# Altium PCB PCB1.PcbDoc
Units mm, origin at the board's own origin, x right, y up, seen from the top; angles counter-clockwise.
Board outline 75.17 x 80.24 mm, 2 copper layers (Top Layer, Bottom Layer); 69 components, 48 nets, 224 pads, 0 vias.
Unrouted connection lines stored in the file: 12.
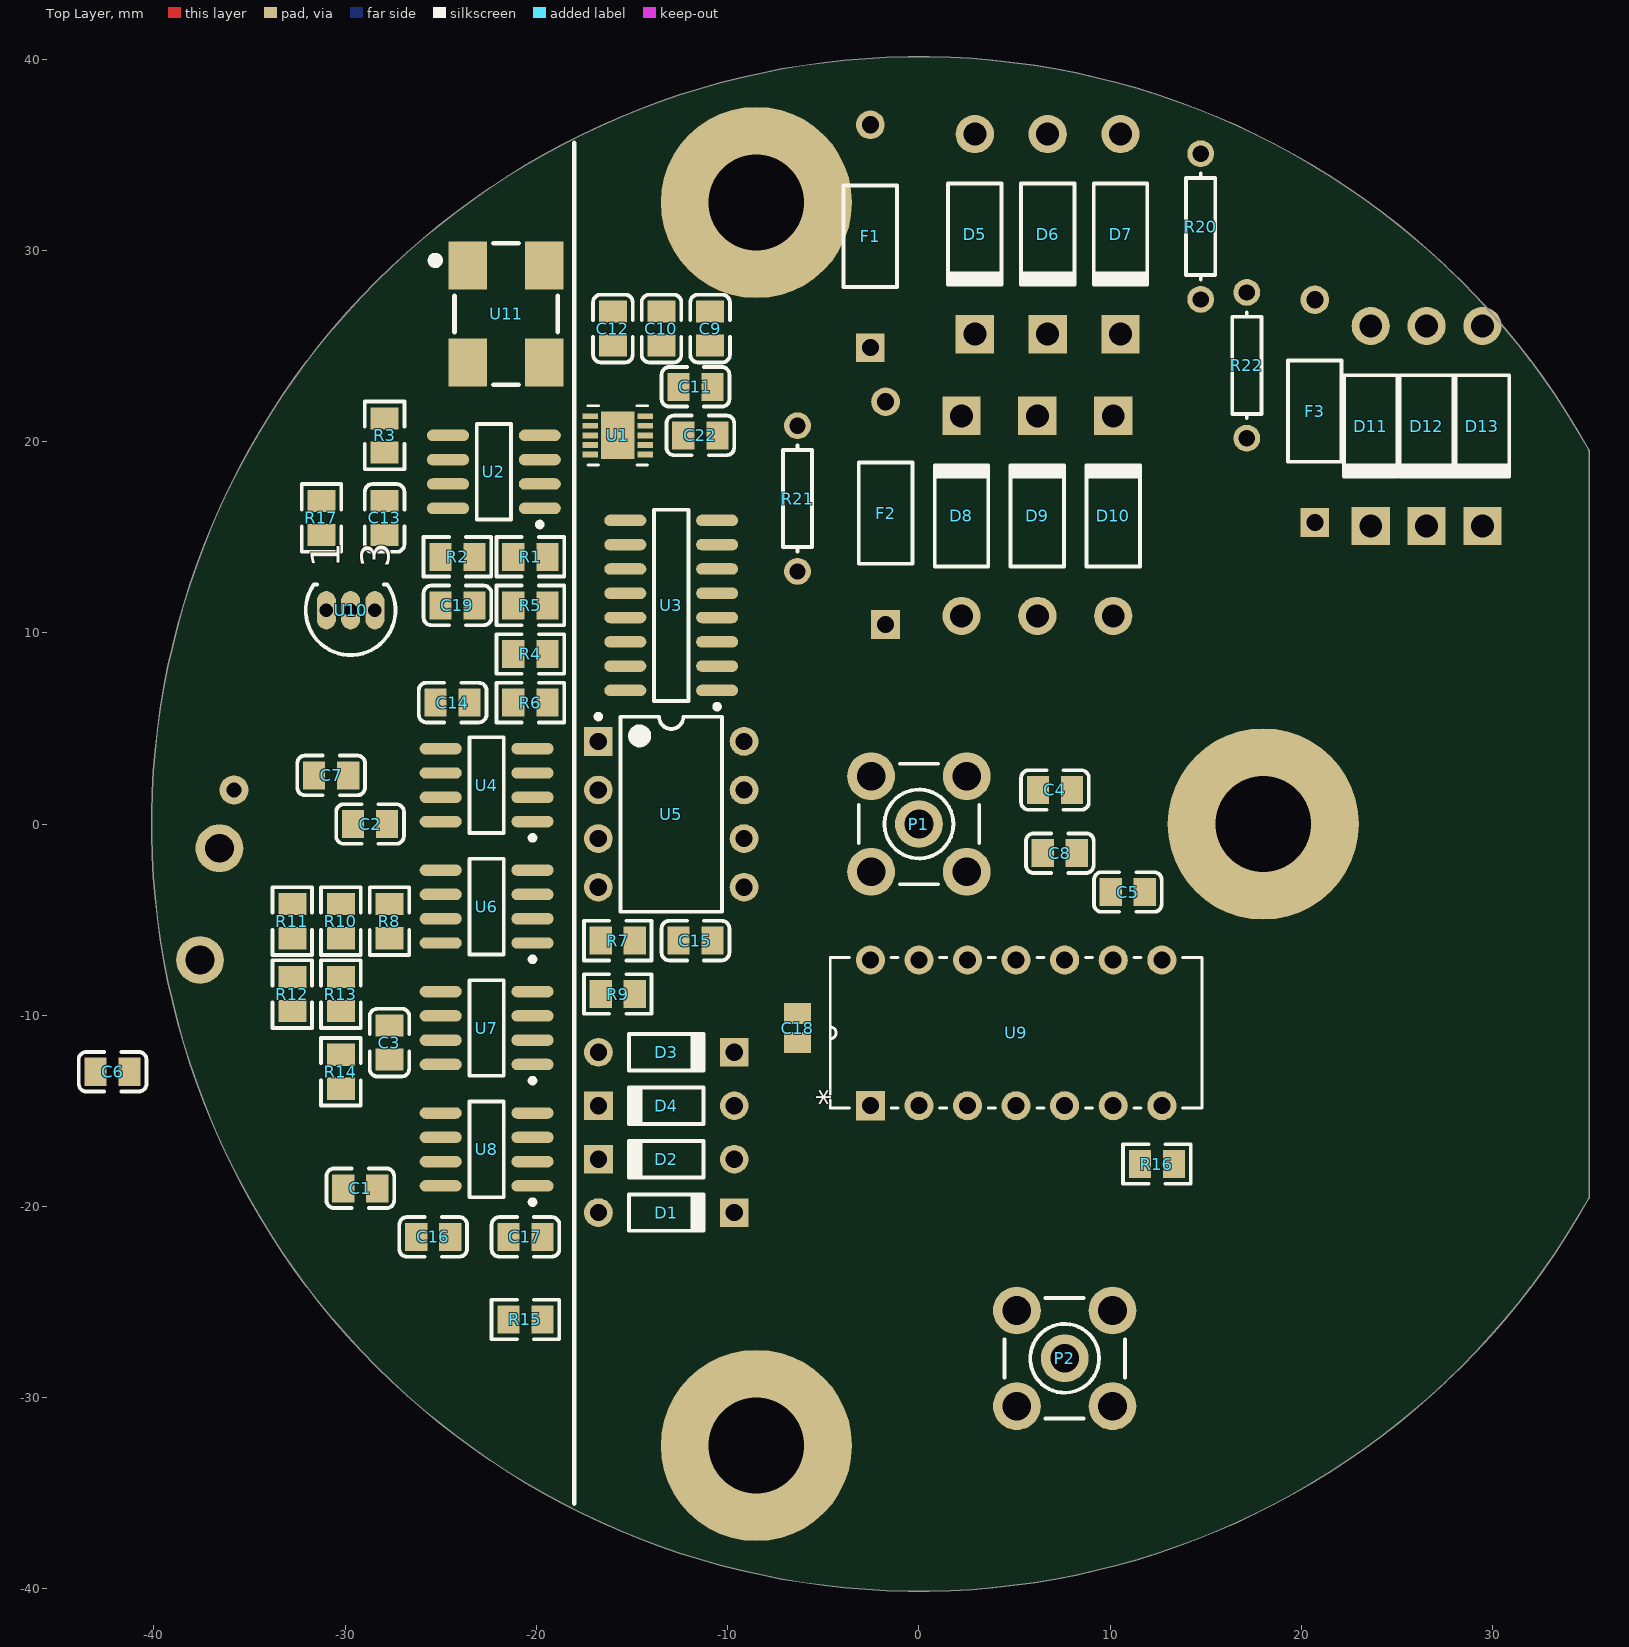
[diagram p0: Top Layer view]
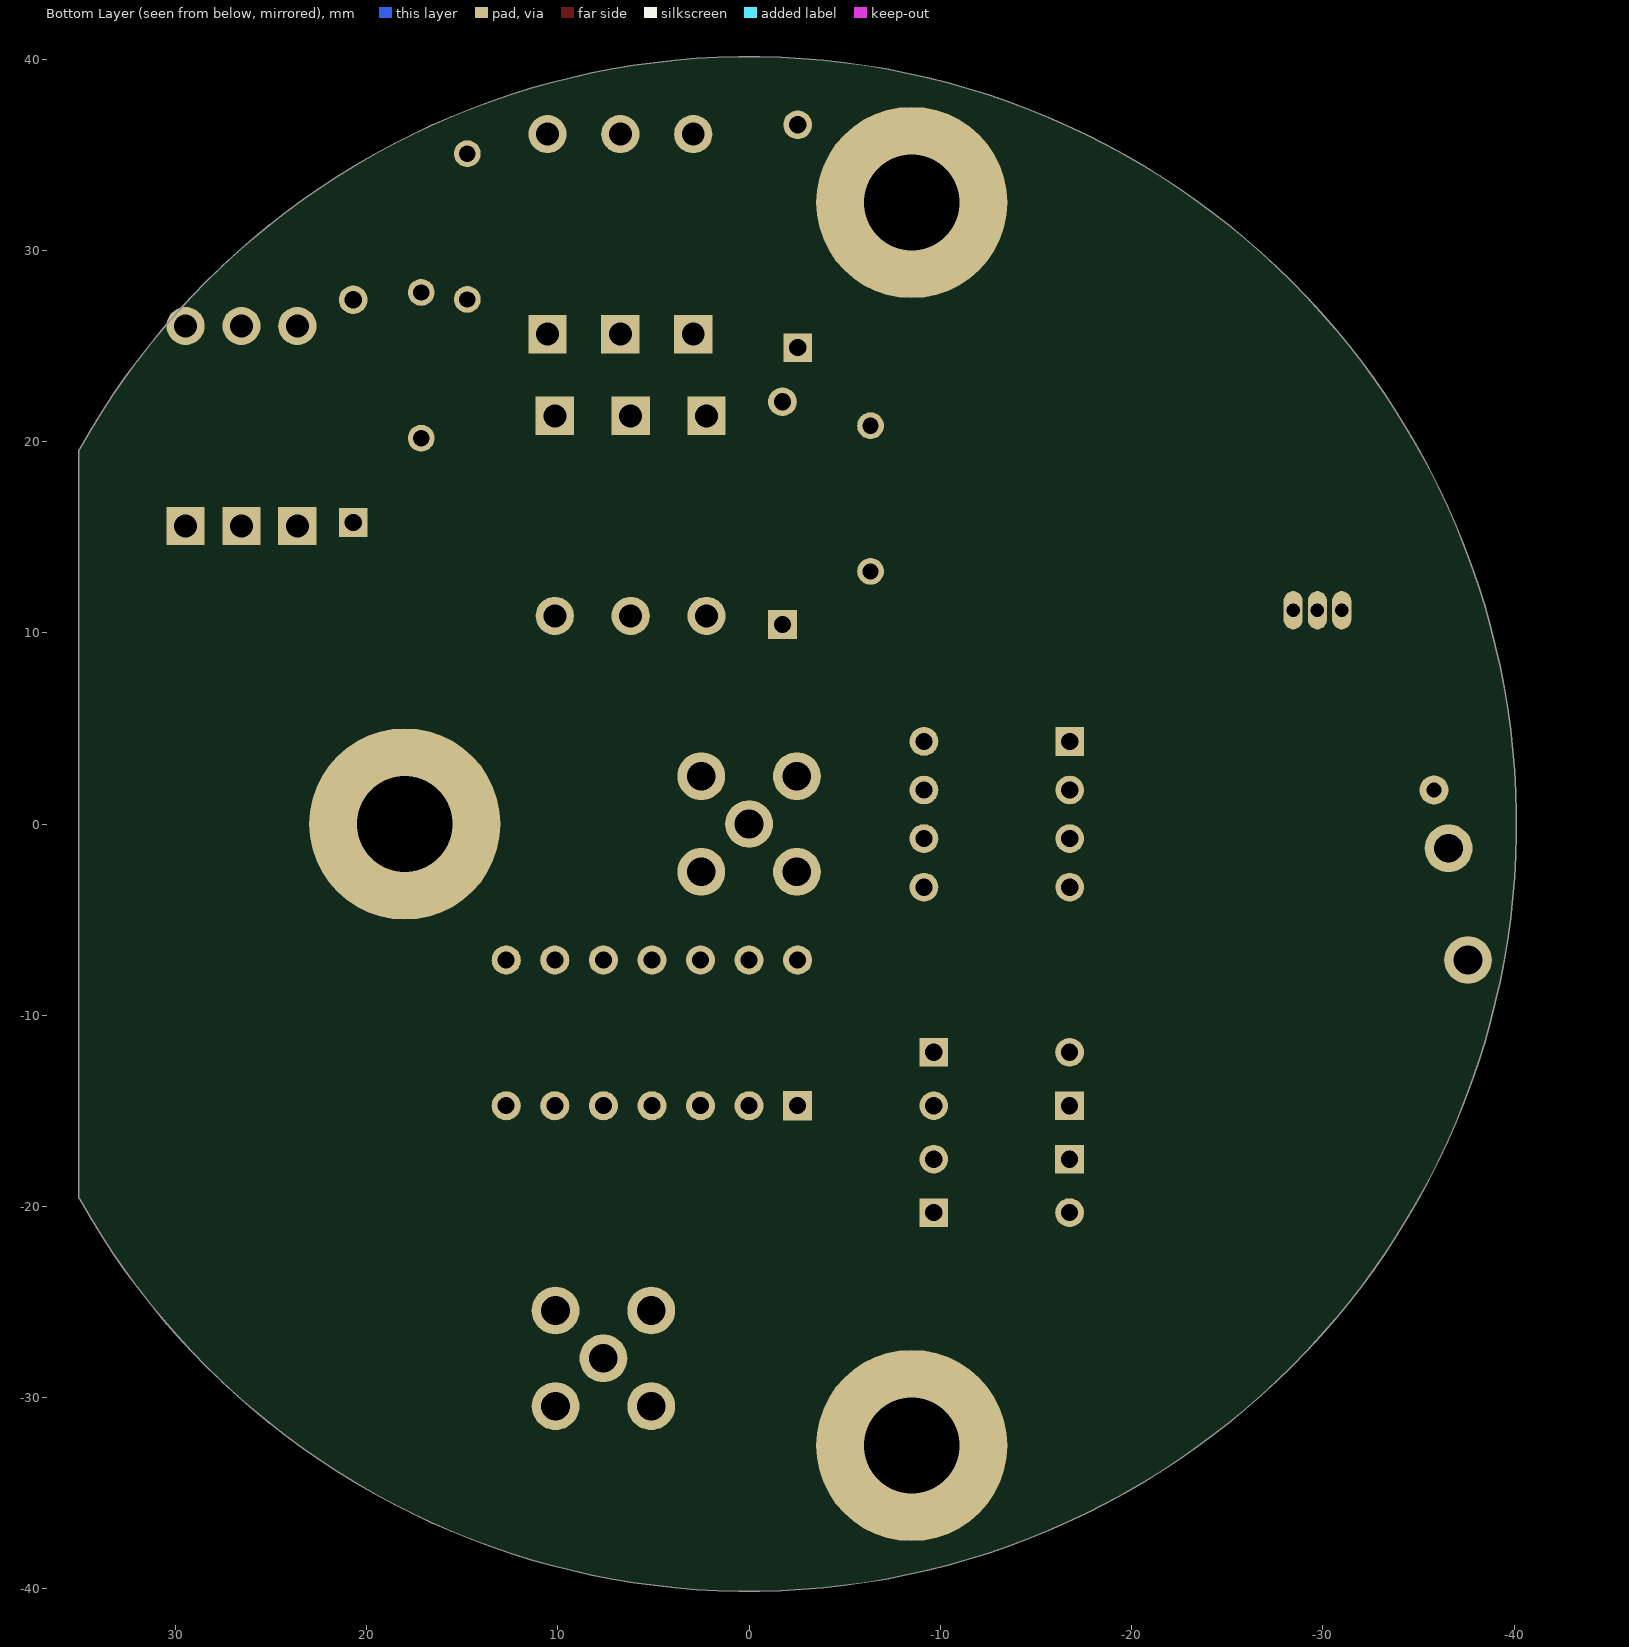
[diagram p1: Bottom Layer view, seen from below]

## Layer stack, top to bottom
Top Solder: solder mask 0.0102, Solder Resist, Dk 3.5
Top Layer: signal copper 0.0356
Dielectric1: dielectric 0.32, FR-4, Dk 4.8
Bottom Layer: signal copper 0.0356
Bottom Solder: solder mask 0.0102, Solder Resist, Dk 3.5

## Board outline
35.008,-19.604 cw(c0,0) 35.008,19.604 cw(c34.897,19.542) 35.023,19.564 cw(c34.925,19.482) 35.052,19.482 35.052,-19.507 cw(c34.925,-19.507) 35.009,-19.603 cw(c34.897,-19.542)

## Design rules (kind name [scope] priority, off if disabled: settings)
Clearance [All] p1: gap=0.254
PolygonConnect [All] p1: connectstyle=Relief reliefconductorwidth=0.254 reliefentries=4 polygonreliefangle="90 Angle" airgapwidth=0.254
RoutingVias [All] p1: holewidth=0.711 width=1.27 viastyle="Through Hole" minholewidth=0.711 minwidth=1.27 maxholewidth=0.711 maxwidth=1.27
SolderMaskExpansion [All] p1: expansion=0.102
Width PWR [InNetClass('PWR')] p1: maxlimit=1 minlimit=1 preferedwidth=1
Width [All] p2: maxlimit=0.3 minlimit=0.3 preferedwidth=0.3
29 further rules are at their usual default settings.

## Classes and differential pairs
component class 齐纳安全栅: D5 D6 D7 D8 D9 D10 D11 D12 D13 F1 F2 F3 R20 R21 R22
component class "Rectification filter": C1 C2 C3 C4 C5 C6 C7 C8 C16 C17 C18 C19 D1 D2 D3 D4 P2 R8 R9 R10 R11 R12 R13 R14 R15 R16 R17 U7 U8 U9 U10
component class "Sin wave": C9 C10 C11 C12 C13 C14 C15 C22 P1 R1 R2 R3 R4 R5 R6 R7 U1 U2 U3 U4 U5 U6 U11

## Components (designator, comment, footprint, x,y, rotation, side; value= is the part's Value field where it differs from the comment)
C1 "100nF(104) 10% 50V" LC-0805_C -29.21,-19.05 r0 top
C2 "100nF(104) 10% 50V" LC-0805_C -28.702,0 r0 top
C3 "100nF(104) 10% 50V" LC-0805_C -27.686,-11.43 r270 top
C4 "100nF(104) 10% 50V" LC-0805_C 7.112,1.778 r180 top
C5 "100nF(104) 10% 50V" LC-0805_C 10.922,-3.556 r180 top
C6 "100nF(104) 10% 50V" LC-0805_C -42.164,-12.954 r180 top
C7 "100nF(104) 10% 50V" LC-0805_C -30.734,2.54 r180 top
C8 "100nF(104) 10% 50V" LC-0805_C 7.366,-1.524 r0 top
C9 "10uF (106) 10% 25V" LC-0805_C -10.922,25.908 r270 top
C10 "100nF(104) 10% 50V" LC-0805_C -13.462,25.908 r270 top
C11 "1nF (102) 10% 50V" LC-0805_C -11.684,22.86 r180 top
C12 "100nF(104) 10% 50V" LC-0805_C -16.002,25.908 r270 top
C13 "100nF(104) 10% 50V" LC-0805_C -27.94,16.002 r90 top
C14 "1uF (105) 10% 50V" LC-0805_C -24.384,6.35 r0 top
C15 "1uF (105) 10% 50V" LC-0805_C -11.684,-6.096 r0 top
C16 "220nF (224) 10% 50V" LC-0805_C -25.4,-21.59 r0 top
C17 "100nF(104) 10% 50V" LC-0805_C -20.574,-21.59 r180 top
C18 "Cap Pol3" C0805 -6.35,-10.668 r270 top
C19 "100nF(104) 10% 50V" LC-0805_C -24.13,11.43 r180 top
C22 "22pF (220) 5% 50V" LC-0805_C -11.43,20.32 r0 top
D1 "Diode 1N4148" DO-35 -13.208,-20.32 r0 top
D2 "Diode 1N4148" DO-35 -13.208,-17.526 r180 top
D3 "Diode 1N4148" DO-35 -13.208,-11.938 r0 top
D4 "Diode 1N4148" DO-35 -13.208,-14.732 r180 top
D5 "1N4743A" DO-41 2.921,30.844 r270 top
D6 "1N4743A" DO-41 6.731,30.844 r270 top
D7 "1N4743A" DO-41 10.541,30.844 r270 top
D8 "1N4743A" DO-41 2.224,16.112 r90 top
D9 "1N4743A" DO-41 6.192,16.112 r90 top
D10 "1N4743A" DO-41 10.16,16.112 r90 top
D11 "1N4729A" DO-41 23.623,20.811 r270 top
D12 "1N4729A" DO-41 26.544,20.811 r270 top
D13 "1N4729A" DO-41 29.464,20.811 r270 top
F1 "Fuse 1" PIN-W2/E2.8 -2.54,30.734 r90 top
F2 "Fuse 1" PIN-W2/E2.8 -1.744,16.256 r90 top
F3 "Fuse 1" PIN-W2/E2.8 20.703,21.59 r90 top
P1 "SMB" SMB_V-RJ45 0,0 r0 top
P2 "SMB" SMB_V-RJ45 7.62,-27.94 r0 top
R1 "4.7KΩ (4701) ±1%" LC-0805_R -20.32,13.97 r180 top
R2 "15KΩ (1502) ±1%" LC-0805_R -24.13,13.97 r180 top
R3 "68Ω (68R0) ±1%" LC-0805_R -27.94,20.32 r270 top
R4 "3.3KΩ (3301) ±1%" LC-0805_R -20.32,8.89 r180 top
R5 "6.8KΩ (6801) ±1%" LC-0805_R -20.32,11.43 r180 top
R6 "100KΩ (1003) ±1%" LC-0805_R -20.32,6.35 r0 top
R7 "100KΩ (1003) ±1%" LC-0805_R -15.748,-6.096 r180 top
R8 "0Ω (0R0) ±1%" LC-0805_R -27.686,-5.08 r270 top
R9 "0Ω (0R0) ±1%" LC-0805_R -15.748,-8.89 r180 top
R10 "10KΩ (1002) ±1%" LC-0805_R -30.226,-5.08 r90 top
R11 "10KΩ (1002) ±1%" LC-0805_R -32.766,-5.08 r270 top
R12 "10KΩ (1002) ±1%" LC-0805_R -32.766,-8.89 r90 top
R13 "20KΩ (2002) ±1%" LC-0805_R -30.226,-8.89 r270 top
R14 "20KΩ (2002) ±1%" LC-0805_R -30.226,-12.954 r270 top
R15 "0Ω (0R0) ±1%" LC-0805_R -20.574,-25.908 r0 top
R16 "0Ω (0R0) ±1%" LC-0805_R 12.446,-17.78 r0 top
R17 "10KΩ (1002) ±1%" LC-0805_R -31.242,16.002 r90 top
R20 "100Ω" AXIAL-0.3 14.732,31.242 r90 top
R21 "100Ω" AXIAL-0.3 -6.35,17.018 r90 top
R22 "10Ω" AXIAL-0.3 17.145,23.986 r270 top
U1 "AD9837BCPZ_RL" CP_10_9 -15.748,20.32 r0 top
U2 "AD8066AR" ADI-R-8_N -22.225,18.415 r180 top
U3 "DG413CY" NSO16_N -12.954,11.43 r180 top
U4 "AD8066AR" ADI-R-8_N -22.606,2.032 r180 top
U5 "AD844AN" ADI-N-8 -12.954,0.508 r0 top
U6 "AD8066AR" ADI-R-8_N -22.606,-4.318 r180 top
U7 "AD8066AR" ADI-R-8_N -22.606,-10.668 r180 top
U8 "AD8066AR" ADI-R-8_N -22.606,-17.018 r180 top
U9 "AD536AJD" D_14 12.7,-7.112 r90 top
U10 "LM336Z-5.0" TO-92 -29.718,11.176 r90 top
U11 "SG-310SCF 16MHZ 3.3V" LC-SMD-7050_4P -21.59,26.67 r270 top

## Footprints (in the part's own frame and the unit in brackets; to place one, negate y for a bottom-side part, rotate by r counter-clockwise, add the part's x,y. Pads: shape width x height; smd on the part's side, far side on the other; paste and mask are expansions set on the pad)
ADI-N-8 [mm] "DIP, 8-Leads, Body 9.59x6.6mm, Pitch 2.54mm"
  rect 1.5x1.5 hole 0.9: 1(-3.81,3.81)
  round 1.5 hole 0.9: 2(-3.81,1.27) 3(-3.81,-1.27) 4(-3.81,-3.81) 5(3.81,-3.81) 6(3.81,-1.27) 7(3.81,1.27) 8(3.81,3.81)
  silkscreen extent -3.93,-5.1 2.65,5.23, body extent -3.95,-5.07 3.95,5.07, height 5.33
ADI-R-8_N [mm] "SOIC, 8-Leads, Body 4.9x3.9mm, Pitch 1.27mm, IPC Medium Density"
  oval 2.2x0.6 smd: 1(-2.4,1.905) 2(-2.4,0.635) 3(-2.4,-0.635) 4(-2.4,-1.905) 5(2.4,-1.905) 6(2.4,-0.635) 7(2.4,0.635) 8(2.4,1.905)
  silkscreen extent -2.53,-2.5 0.9,2.88, body extent -2,-2.5 2,2.5, height 1.75
AXIAL-0.3 [mm] "Axial Device, Thru-Hole; 2 Leads; 0.3 in Pin Spacing"
  round 1.4 hole 0.85: 1(-3.81,0) 2(3.81,0)
  silkscreen extent -2.77,-0.76 2.77,0.76
C0805 [mm] "Chip Capacitor, Body 2.0x1.3mm, IPC High Density"
  rect 1.1x1.4 smd: 1(-0.75,0) 2(0.75,0)
  body extent -1.1,-0.72 1.1,0.72, height 1.4
CP_10_9 [mil]
  rect 32x12 smd mask+4: 1(-57,39.37) 2(-57,19.69) 3(-57,0) 4(-57,-19.69) 5(-57,-39.37) 6(57,-39.37) 7(57,-19.69) 8(57,0) 9(57,19.69) 10(57,39.37)
  rect 69x98 smd: 11(0,0)
  silkscreen extent -61,-61 61,61, body extent 0,0 10,10, height 10
D_14 [mil]
  rect 60x60 / inner round 60 / far side rect 60x60 hole 35: 1(-300,600)
  round 60 hole 35: 2(-300,500) 3(-300,400) 4(-300,300) 5(-300,200) 6(-300,100) 7(-300,0) 8(0,0) 9(0,100) 10(0,200) 11(0,300) 12(0,400) 13(0,500) 14(0,600)
  silkscreen extent -305,-83 5,682, body extent 0,0 10,10, height 10
DO-35 [mm] "Diode, Axial; Body 3.8 x 1.9 mm (LxDia. max), Lead Dia. 0.53 mm (max)"
  round 1.5 hole 0.9: 1(-3.55,0)
  rect 1.5x1.5 hole 0.9: 2(3.55,0)
  silkscreen extent -1.95,-0.95 2.05,0.95
DO-41 [mm] "Diode, Axial; Body 5.2 x 2.7 mm (LxDia. max), Lead Dia. 0.86 mm (max)"
  round 2 hole 1.2: 1(-5.23,0)
  rect 2x2 hole 1.2: 2(5.23,0)
  silkscreen extent -2.65,-1.4 2.75,1.4
LC-0805_C [mm]
  rect 1.16x1.47 smd: 1(-0.89,0) 2(0.89,0)
  silkscreen extent -1.77,-1.04 1.77,1.04, body extent -1,-0.62 1,0.63, height 0.77
LC-0805_R [mm]
  rect 1.16x1.47 smd: 1(-0.89,0) 2(0.89,0)
  silkscreen extent -1.77,-1.04 1.77,1.03, body extent -1,-0.62 1,0.63, height 0.49
LC-SMD-7050_4P [mm]
  rect 2.5x2 smd: 1(-2.54,-2) 2(2.54,-2) 3(2.54,2) 4(-2.54,2)
  silkscreen extent -3.7,-3.9 3.7,2.7
NSO16_N [mm] "SOIC, 16-Leads, Body 9.9x3.9mm, Pitch 1.27mm, IPC Medium Density"
  oval 2.2x0.6 smd: 1(-2.4,4.445) 2(-2.4,3.175) 3(-2.4,1.905) 4(-2.4,0.635) 5(-2.4,-0.635) 6(-2.4,-1.905) 7(-2.4,-3.175) 8(-2.4,-4.445) 9(2.4,-4.445) 10(2.4,-3.175) 11(2.4,-1.905) 12(2.4,-0.635) 13(2.4,0.635) 14(2.4,1.905) 15(2.4,3.175) 16(2.4,4.445)
  silkscreen extent -2.53,-5 0.9,5.42, body extent -2,-5 2,5, height 1.75
PIN-W2/E2.8 [mm] "Thru-Hole; 2 Leads"
  rect 1.5x1.5 hole 0.9: 1(-5.825,0)
  round 1.5 hole 0.9: 2(5.825,0)
  silkscreen extent -2.65,-1.4 2.65,1.4
SMB_V-RJ45 [mm] "Connector; SMB Straight"
  round 2.5 hole 1.5: 1(0,0) 2(-2.5,-2.5) 2(-2.5,2.5) 2(2.5,-2.5) 2(2.5,2.5)
  silkscreen extent -3.15,-3.15 3.15,3.15
TO-92 [mm] "TO, Flat Index; 3 In-Line, Axial Leads; Body Dia. 4.6mm; Leads 0.41 x 0.39 mm (max)"
  oval 2x1 hole 0.7: 1(0,1.27) 2(0,0) 3(0,-1.27)
  silkscreen extent -2.34,-2.34 1.35,2.34

## Part data
C1 C2 C3 C4 C5 C6 C7 C8 C10 C12 C13 C17 C19: library part "0805 100nF(104) 10% 50V", "贴片电容"
C9: library part "0805 10uF (106) 10% 25V", "贴片电容"
C11: library part "0805 1nF (102) 10% 50V", "贴片电容"
C14 C15: library part "0805 1uF (105) 10% 50V", "贴片电容"
C16: library part "0805 220nF (224) 10% 50V", "贴片电容"
C18: "Polarized Capacitor (Surface Mount)"
C22: library part "0805 22pF (220) 5% 50V", "贴片电容"
D1 D2 D3 D4: "High Conductance Fast Diode"
D5 D6 D7 D8 D9 D10 D11 D12 D13: library part "D Zener", "Zener Diode"
F1 F2 F3: "Fuse"
P1 P2: "SMB Straight Connector"
R1: library part "0805 4.7KΩ (4701) 1%", "贴片电阻"
R2: library part "0805 15KΩ (1502) 1%", "贴片电阻"
R3: library part "0805 68Ω (68R0) 1%", "贴片电阻"
R4: library part "0805 3.3KΩ (3301) 1%", "贴片电阻"
R5: library part "0805 6.8KΩ (6801) 1%", "贴片电阻"
R6 R7: library part "0805 100KΩ (1003) 1%", "贴片电阻"
R8 R9 R15 R16: library part "0805 0Ω (0R0) 1%", "贴片电阻"
R10 R11 R12 R17: library part "0805 10KΩ (1002) 1%", "贴片电阻"
R13 R14: library part "0805 20KΩ (2002) 1%", "贴片电阻"
R20 R21 R22: library part Res1, "Resistor"
U1 U9: "Imported"
U2 U4 U6 U7 U8: "Double Channel Low Power Operational Amplifier, 145 MHz BW, 180 V/us SR, Industrial, 8-pin SOIC (R-8), Tube"
U3: "Improved, Quad, SPST Analog Switches"
U5: "Single Channel Wide Bandwidth Operational Amplifier, 60 MHz BW, 2 KV/us SR, Industrial, 8-pin DIP (N-8), Tube"
U10: "5.0V Reference Diode, 3-pin TO-92"
U11: library part "SW DIP-2", "DIP Switch, 2 Position, SPST"

## Free pads (board coordinates)
  round 10 hole 5: 0(18,0) 1(-8.5,32.5) 2(-8.5,-32.5)
  round 1.524 hole 0.762: 2(-35.814,1.778)
  round 2.5 hole 1.5: ""(-37.592,-7.112) ""(-36.576,-1.27)

## Nets (pads, with @x,y where several pads share a name; then routed paths per layer and width w, separated by ;. In a path a pad name is that pad's centre, name@x,y a point inside that pad or via, vN(x,y) a via of type N, cw(c..) or ccw(c..) an arc to the next point about the centre after c; other vN are vias at no path point)
+3.3V: R22.2
+3VIN: F3.1
+5V: C19.2 R17.1 U3.12 U10.2
+12V: C1.2 C2.2 C3.2 C4.2 C18.1 pad.@-37.592,-7.112 R17.2 R20.2 U2.8 U3.13 U4.8 U5.7 U6.8 U7.8 U8.8 U9.14
+12VIN: F1.1
-12V: C5.1 C6.1 C7.1 C8.1 pad.@-36.576,-1.27 R21.2 U2.4 U3.4 U4.4 U5.4 U6.4 U7.4 U8.4 U9.3
-12VIN: F2.1
AOUT1: C16.2 R15.1 U8.1 U8.2
AOUT2: R16.1 U9.6
FSYNC: U1.8
GND: C1.1 C2.1 C3.1 C4.1 C5.2 C6.2 C7.2 C8.2 C9.1 C10.1 C12.1 C14.1 C17.1 C19.1 C22.2 D5.1 D6.1 D7.1 D8.1 D9.1 D10.1 D11.1 D12.1 D13.1 P2.2 pad.0 pad.1 pad.2 R1.1 R3.1 R7.1 U1.4 U1.9 U3.5 U7.3 U9.9 U9.10 U10.3 U11.2
IMSK: C15.2 P1.2
IN3: U3.9
IOUT: P1.1 U5.5 U6.3 U6.5
MCLK: U1.5 U11.3
NetC11_2: C11.2 U1.1
NetC12_2: C12.2 U1.3
NetC13_1: C13.1 R2.2 U2.1
NetC13_2: C13.2 R3.2 U2.5
NetC14_2: C14.2 R6.1 U4.5
NetC15_1: C15.1 R7.2 U6.1 U6.2
NetC16_1: C16.1 R13.2 R14.1
NetC17_2: C17.2 R14.2 U8.3
NetC18_2: C18.2 U9.4
NetC22_1: C22.1 U1.10 U2.3
NetD1_1: D1.1 R10.2 R11.1 U7.2
NetD1_2: D1.2 D2.1 U7.1
NetD2_2: D2.2 D4.2 R11.2 R12.2 R13.1
NetD3_1: D3.1 R12.1 U7.6
NetD3_2: D3.2 D4.1 U7.7
NetD5_2: D5.2 D6.2 D7.2 F1.2 R20.1
NetD8_2: D8.2 D9.2 D10.2 F2.2 R21.1
NetD11_2: D11.2 D12.2 D13.2 F3.2 R22.1
NetP2_1: P2.1 R15.2 R16.2
NetR1_2: R1.2 R2.1 U2.2
NetR4_1: R4.1 U3.11
NetR4_2: R4.2 R5.2 U4.2 U5.2
NetR5_1: R5.1 U3.10 U4.6 U4.7
NetR6_2: R6.2 U5.6
NetR8_2: R8.2 R10.1 U7.5
NetR9_1: R9.1 U9.1
NetU4_1: U4.1 U5.3
NetU9_7: U9.7 U9.8
SCLK: U1.7
SDATA: U1.6
SINOUT: U2.6 U2.7 U4.3
VOUT: R8.1 R9.2 U6.6 U6.7
WD3.3V: C9.2 C10.2 C11.1 U1.2 U11.1 U11.4
pads on no net: U1.11 U3.1 U3.2 U3.3 U3.6 U3.7 U3.8 U3.14 U3.15 U3.16 U5.1 U5.8 U8.5 U8.6 U8.7 U9.2 U9.5 U9.11 U9.12 U9.13 U10.1

## Silkscreen, mask and mechanical layers (free items; w line width, h text height)
Top Overlay:
  lines w0.254: -18.025,-35.525 -18.025,35.6
Mechanical 1:
  lines w0.254: 34.897,-19.542 cw(c0,0) 34.897,19.542 ; 34.925,-19.507 34.925,19.482

## Text inside footprints (layer, text, board x,y; h text height)
U9: Top Overlay "*" at -4.064,-14.732 h1.27 r90; Mechanical 13 "*" at -4.064,-14.732 h1.27 r90
U10: Top Overlay "3" at -27.683,13.4 h1.5 r90; Top Overlay "1" at -30.278,13.4 h1.5 r90